# Altium PCB 8 step seq SMT.PcbDoc
Units mm, origin at the board's own origin, x right, y up, seen from the top; angles counter-clockwise.
Board outline 69.8 x 106.5 mm, 2 copper layers (Top Layer, Bottom Layer); 116 components, 86 nets, 323 pads, 0 vias.
Unrouted connection lines stored in the file: 202.
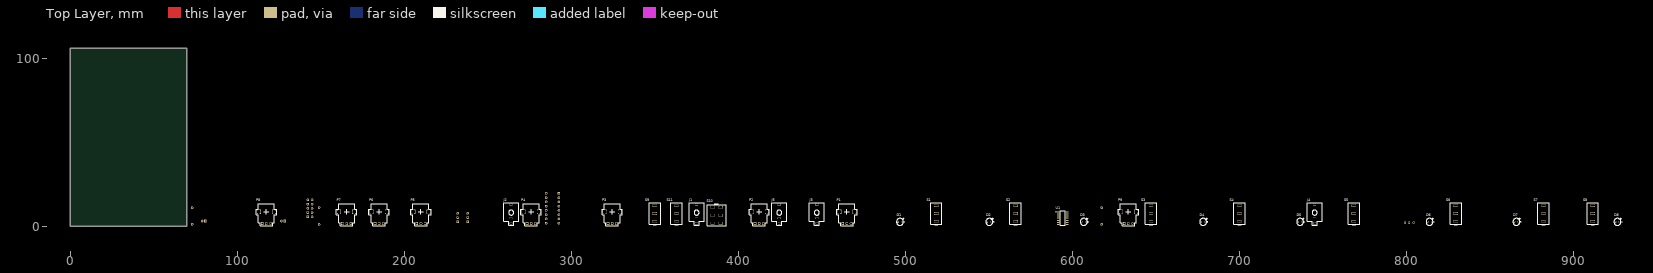
[diagram p0: Top Layer view]
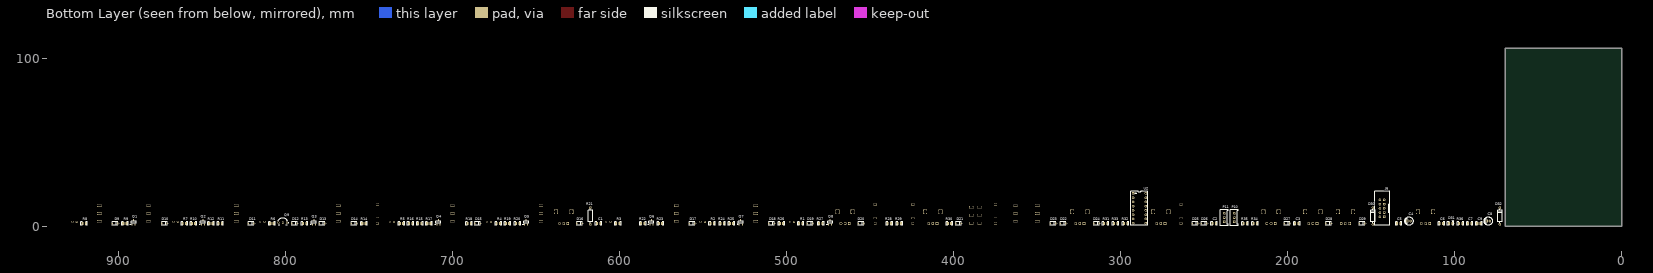
[diagram p1: Bottom Layer view, seen from below]

## Layer stack, top to bottom
Top Solder: solder mask 0.0102, Solder Resist, Dk 3.5
Top Layer: signal copper 0.0356
Dielectric 1: dielectric 0.32, FR-4, Dk 4.8
Bottom Layer: signal copper 0.0356
Bottom Solder: solder mask 0.0102, Solder Resist, Dk 3.5

## Board outline
0,0 0,106.5 69.8,106.5 69.8,0

## Design rules (kind name [scope] priority, off if disabled: settings)
Clearance [All] p1: gap=0.2 ignorepadtopadclearanceinfootprint=FALSE except(0.25: Arc-Hole Track-Hole SMDPad-Hole THPad-Hole Via-Hole Fill-Hole Poly-Hole Region-Hole Text-Hole)
Height [All] p1: minheight=0 maxheight=35 prefheight=12.7
HoleSize [All] p1: absolutevalues=TRUE maxlimit=6.2 minlimit=0 maxpercent=80.000 minpercent=20.000
HoleToHoleClearance [All] p1: gap=0.3 allowstackedmicrovias=TRUE
MinimumSolderMaskSliver [All] p1: minsoldermaskwidth=0.2
PolygonConnect [All] p1: connectstyle=Relief reliefconductorwidth=0.254 reliefentries=4 polygonreliefangle="90 Angle" airgapwidth=0.254
RoutingVias [All] p1: holewidth=0.2 width=0.5 viastyle="Through Hole" minholewidth=0.15 minwidth=0.3 maxholewidth=0.711 maxwidth=1.27
SilkToSilkClearance [All] p1: silktosilkclearance=0.15
SilkToSolderMaskClearance [IsPad] p1: minsilkscreentomaskgap=0.1 clearancetoexposedcopper=TRUE
SolderMaskExpansion [All] p1: expansion=0.05 istentingtop=FALSE
SupplyNets "Schematic Supply Nets_2" [InNet('-12 V')] p1: voltage=0.000
SupplyNets "Schematic Supply Nets_1" [InNet('GND')] p2: voltage=0.000
SupplyNets "Schematic Supply Nets" [InNet('+12 V')] p3: voltage=0.000
Width [All] p1: maxlimit=0.5 minlimit=0.2 preferedwidth=0.254
24 further rules are at their usual default settings.

## Components (designator, comment, footprint, x,y, rotation, side; value= is the part's Value field where it differs from the comment)
C1 "CAP" "Cap SMD 0805" 613.599,1.5 r180 bottom value=1uF
C2 "CAP" "Cap SMD 0805" 245.099,1.5 r180 bottom value=1nF
C3 "CAP" "Cap SMD 0805" 195.6,1.5 r180 bottom value=100nF
C4 "CAP" "Cap electrolytic THT 5mm" 128.5,3 r180 bottom value=47uF
C5 "CAP" "Cap SMD 0805" 134.6,1.5 r180 bottom value=100nF
C6 "CAP" "Cap SMD 0805" 109.1,1.5 r180 bottom value=100nF
C7 "CAP" "Cap SMD 0805" 92.1,1.5 r180 bottom value=100nF
C8 "CAP" "Cap electrolytic THT 5mm" 81,3 r180 bottom value=47uF
C9 "CAP" "Cap SMD 0805" 86.6,1.5 r180 bottom value=100nF
D1 "LED" "LED THT 3 mm raised" 495.499,2.5 r0 top
D2 "LED" "LED THT 3 mm raised" 548.999,2.5 r0 top
D3 "LED" "LED THT 3 mm raised" 605.499,2.5 r0 top
D4 "LED" "LED THT 3 mm raised" 676.999,2.5 r0 top
D5 "LED" "LED THT 3 mm raised" 734.998,2.5 r0 top
D6 "LED" "LED THT 3 mm raised" 812.498,2.5 r0 top
D7 "LED" "LED THT 3 mm raised" 864.498,2.5 r0 top
D8 "LED" "LED THT 3 mm raised" 924.998,2.5 r0 top
D9 "DIODE" SOD-123 903.68,1.5 r180 bottom
D10 "DIODE" SOD-123 874.18,1.5 r180 bottom
D11 "DIODE" SOD-123 822.18,1.5 r180 bottom
D12 "DIODE" SOD-123 796.18,1.5 r180 bottom
D13 "DIODE" SOD-123 779.68,1.5 r180 bottom
D14 "DIODE" SOD-123 760.68,1.5 r180 bottom
D15 "DIODE" SOD-123 686.681,1.5 r180 bottom
D16 "DIODE" SOD-123 625.681,1.5 r180 bottom
D17 "DIODE" SOD-123 558.181,1.5 r180 bottom
D18 "DIODE" SOD-123 510.681,1.5 r180 bottom
D19 "DIODE" SOD-123 487.681,1.5 r180 bottom
D20 "DIODE" SOD-123 457.181,1.5 r180 bottom
D21 "DIODE" SOD-123 398.681,1.5 r180 bottom
D22 "DIODE" SOD-123 336.181,1.5 r180 bottom
D23 "DIODE" SOD-123 342.181,1.5 r180 bottom
D24 "DIODE" SOD-123 316.181,1.5 r180 bottom
D25 "DIODE" SOD-123 257.181,1.5 r180 bottom
D26 "DIODE" SOD-123 251.681,1.5 r180 bottom
D27 "DIODE" SOD-123 202.182,1.5 r180 bottom
D28 "DIODE" SOD-123 177.182,1.5 r180 bottom
D29 "DIODE" SOD-123 157.182,1.5 r180 bottom
D30 "SCHOTTKY" "Diode THT 10 mm" 149,1 r90 bottom
D31 "LED" "LED SMD 0805" 103.512,1.5 r180 bottom
D32 "SCHOTTKY" "Diode THT 10 mm" 73,1 r90 bottom
J1 "JACK Mono" PJ301M 374.999,8 r0 top
J2 "JACK Mono" PJ301M 263.999,8 r0 top
J3 "JACK Mono" PJ301M 446.999,8 r0 top
J4 "JACK Mono" PJ301M 744.998,8 r0 top
J5 "JACK Mono" PJ301M 424.499,8 r0 top
J6 "IDC 10" "IDC 10 PIN" 142.273,5.5 r180 bottom
P1 "Mono Pot" "9 mm PCB Potentiometer" 464.999,8.5 r0 top value=B100k
P2 "Mono Pot" "9 mm PCB Potentiometer" 412.499,8.5 r0 top value=B100k
P3 "Mono Pot" "9 mm PCB Potentiometer" 324.499,8.5 r0 top value=B100k
P4 "Mono Pot" "9 mm PCB Potentiometer" 275.999,8.5 r0 top value=B100k
P5 "Mono Pot" "9 mm PCB Potentiometer" 210,8.5 r0 top value=B100k
P6 "Mono Pot" "9 mm PCB Potentiometer" 185,8.5 r0 top value=B100k
P7 "Mono Pot" "9 mm PCB Potentiometer" 165.5,8.5 r0 top value=B100k
P8 "Mono Pot" "9 mm PCB Potentiometer" 117.5,8.5 r0 top value=B100k
P9 "VR" "9 mm PCB Potentiometer" 633.499,8.5 r0 top value=B250k
P10 "VR" "Multiturn Potentiometer inline" 231.999,2.5 r90 bottom value=5k
P11 "VR" "Multiturn Potentiometer inline" 237.999,2.5 r90 bottom value=2k
Q1 "BC847" SOT-23-3 891.921,1 r180 bottom
Q2 "BC847" SOT-23-3 850.421,1 r180 bottom
Q3 "BC847" SOT-23-3 783.921,1 r180 bottom
Q4 "BC847" SOT-23-3 709.422,1 r180 bottom
Q5 "BC847" SOT-23-3 656.922,1 r180 bottom
Q6 "BC847" SOT-23-3 581.922,1 r180 bottom
Q7 "BC847" SOT-23-3 528.422,1 r180 bottom
Q8 "BC847" SOT-23-3 474.922,1 r180 bottom
Q9 "BC547" "TO-92 wide" 804.215,2 r180 bottom
R1 "RES" "Resistor SMD 0805" 492.599,1.5 r180 bottom value=1k
R2 "RES" "Resistor SMD 0805" 545.599,1.5 r180 bottom value=1k
R3 "RES" "Resistor SMD 0805" 602.099,1.5 r180 bottom value=1k
R4 "RES" "Resistor SMD 0805" 673.599,1.5 r180 bottom value=1k
R5 "RES" "Resistor SMD 0805" 731.598,1.5 r180 bottom value=1k
R6 "RES" "Resistor SMD 0805" 809.098,1.5 r180 bottom value=1k
R7 "RES" "Resistor SMD 0805" 861.598,1.5 r180 bottom value=1k
R8 "RES" "Resistor SMD 0805" 921.598,1.5 r180 bottom value=1k
R9 "RES" "Resistor SMD 0805" 897.098,1.5 r180 bottom value=100k
R10 "RES" "Resistor SMD 0805" 856.098,1.5 r180 bottom value=100k
R11 "RES" "Resistor SMD 0805" 840.098,1.5 r180 bottom value=100k
R12 "RES" "Resistor SMD 0805" 845.598,1.5 r180 bottom value=47k
R13 "RES" "Resistor SMD 0805" 789.598,1.5 r180 bottom value=100k
R14 "RES" "Resistor SMD 0805" 754.098,1.5 r180 bottom value=200r
R15 "RES" "Resistor SMD 0805" 720.599,1.5 r180 bottom value=100k
R16 "RES" "Resistor SMD 0805" 726.098,1.5 r180 bottom value=4k7
R17 "RES" "Resistor SMD 0805" 715.099,1.5 r180 bottom value=100k
R18 "RES" "Resistor SMD 0805" 691.099,1.5 r180 bottom value=100k
R19 "RES" "Resistor SMD 0805" 668.099,1.5 r180 bottom value=100k
R20 "RES" "Resistor SMD 0805" 662.099,1.5 r180 bottom value=100k
R21 "RES" "Resistor THT 10mm" 617.499,1 r90 bottom value=6k8
R22 "RES" "Resistor SMD 0805" 587.099,1.5 r180 bottom value=100k
R23 "RES" "Resistor SMD 0805" 576.599,1.5 r180 bottom value=1k
R24 "RES" "Resistor SMD 0805" 539.599,1.5 r180 bottom value=100k
R25 "RES" "Resistor SMD 0805" 534.099,1.5 r180 bottom value=100k
R26 "RES" "Resistor SMD 0805" 504.099,1.5 r180 bottom value=100k
R27 "RES" "Resistor SMD 0805" 480.599,1.5 r180 bottom value=100k
R28 "RES" "Resistor SMD 0805" 439.599,1.5 r180 bottom value=1k
R29 "RES" "Resistor SMD 0805" 433.599,1.5 r180 bottom value=1k
R30 "RES" "Resistor SMD 0805" 403.599,1.5 r180 bottom value=68k
R31 "RES" "Resistor SMD 0805" 310.099,1.5 r180 bottom value=100k
R32 "RES" "Resistor SMD 0805" 298.099,1.5 r180 bottom value=51k
R33 "RES" "Resistor SMD 0805" 304.099,1.5 r180 bottom value=18k
R34 "RES" "Resistor SMD 0805" 220.6,1.5 r180 bottom value=100k
R35 "RES" "Resistor SMD 0805" 226.599,1.5 r180 bottom value=100k
R36 "RES" "Resistor SMD 0805" 97.6,1.5 r180 bottom value=10k
S1 "SPDT" MTS-102 518.499,7.5 r0 top
S2 "SPDT" MTS-102 565.999,7.5 r0 top
S3 "SPDT" MTS-102 646.999,7.5 r0 top
S4 "SPDT" MTS-102 699.999,7.5 r0 top
S5 "SPDT" MTS-102 768.498,7.5 r0 top
S6 "SPDT" MTS-102 829.498,7.5 r0 top
S7 "SPDT" MTS-102 881.998,7.5 r0 top
S8 "SPDT" MTS-102 911.498,7.5 r0 top
S9 "SPDT" MTS-102 349.999,7.5 r0 top
S10 "DPDT" MTS-202 386.999,6.5 r0 top
S11 "SPDT" MTS-102 362.999,7.5 r0 top
U1 "TL074CDR" SOIC14 591.499,8.5 r0 top
U2 "CD4017BE" "DIP-16 socket" 292.599,19.5 r180 bottom

## Footprints (in the part's own frame and the unit in brackets; to place one, negate y for a bottom-side part, rotate by r counter-clockwise, add the part's x,y. Pads: shape width x height; smd on the part's side, far side on the other; paste and mask are expansions set on the pad)
"9 mm PCB Potentiometer" [mm] "Generic 9 mm shaft potentiometer PCB mount"
  rect 1.6x1.6 hole 1.1: 1(-2.5,-7)
  round 1.6 hole 1.1: 2(0,-7) 3(2.5,-7)
  rect 2.4x2.7 hole 1.8 slot 2.2 at 90 deg: 11(-4.575,0) 11(4.575,0)
  silkscreen extent -6.1,-8.25 6.1,4.85, body extent -5.66,-7.1 5.66,5.5, height 25
"Cap electrolytic THT 5mm" [mil] "THT electrolytic capacitor 5 mm diameter"
  rect 60x60 hole 30: 1(0,0)
  round 60 hole 30: 2(78.74,0)
  silkscreen extent -59,-98 138,98, body extent -59,-98 137,98, height 354
"Cap SMD 0805" [mm] "SMD non polarised 0805 capacitor"
  rect 1.3x1.55 smd: 1(0,0) 2(2.1,0)
  silkscreen extent -0.87,-1 2.98,1, body extent -0.1,-0.72 2.2,0.72, height 0.7
"Diode THT 10 mm" [mil] "THT axial diode 10 mm pitch"
  round 60 hole 35.43: 1(0,0) 2(393.7,0)
  silkscreen extent 41,-51 352,51, body extent -21,-53 411,53, height 107
"DIP-16 socket" [mil] "Socket for DIP-16 ICs"
  rect 60x60 hole 30: 1(0,0)
  round 60 hole 30: 2(0,-100) 3(0,-200) 4(0,-300) 5(0,-400) 6(0,-500) 7(0,-600) 8(0,-700) 9(300,-700) 10(300,-600) 11(300,-500) 12(300,-400) 13(300,-300) 14(300,-200) 15(300,-100) 16(300,0)
  silkscreen extent -51,-751 350,50, body extent -33,-747 333,45, height 294
"IDC 10 PIN" [mil] "10 PIN IDC Connector"
  rect 60x60 hole 30: 1(0,0)
  round 60 hole 30: 2(-100,0) 3(0,100) 4(-100,100) 5(0,200) 6(-100,200) 7(0,300) 8(-100,300) 9(0,400) 10(-100,400)
  silkscreen extent -227,-200 127,600, body extent -223,-204 127,604, height 354
"LED SMD 0805" [mm] "SMD LED diode 0805 package"
  rect 1.3x1.55 smd: 1(0,0) 2(2.1,0)
  silkscreen extent -0.87,-1 3.36,1.8, body extent 0.05,-0.63 2.05,0.63, height 0.8
"LED THT 3 mm raised" [mm] "THT LED diode 3 mm diameter"
  round 1.2 hole 0.762: 1(0,0)
  rect 1x1 hole 0.762: 2(2.54,0)
  silkscreen extent -0.83,-2.1 3.93,2.57, body extent -0.64,-1.92 2.92,1.92, height 10.83
MTS-102 [mm] "SPDT on-on toggle switch"
  rect 2.6x1.524 hole 1 slot 2.2 at 0 deg: 1(0,4.7) 2(0,0) 3(0,-4.7)
  silkscreen extent -3.43,-6.79 3.43,6.35, body extent -5.97,-7 5.97,6.45, height 28.44
MTS-202 [mm] "DPDT on-on toggle switch"
  rect 2.6x1.524 hole 1 slot 2.2 at 0 deg: 1(-2.415,-4.7) 2(-2.415,0) 3(-2.415,4.7) 4(2.415,-4.7) 5(2.415,0) 6(2.415,4.7)
  silkscreen extent -5.71,-6.35 5.72,6.79, body extent -6.25,-6.45 6.25,7, height 28.44
"Multiturn Potentiometer inline" [mil] "PCB mount inline multiturn trimmer pot with parameter label"
  rect 60x60 hole 30: 1(0,0)
  round 60 hole 30: 2(100,0) 3(200,0)
  silkscreen extent -89,-94 289,94, body extent -89,-95 289,95, height 454
PJ301M [mm] "3,5 mm Jack mono PCB Mount"
  rect 1.7x1.1 hole 0.6 slot 1.3 at 0 deg: 1(0,-6.48)
  rect 1.9x1.1 hole 0.6 slot 1.5 at 0 deg: 2(0,-3.38) 3(0,4.92)
  silkscreen extent -4.5,-7.5 4.5,6, body extent -4.5,-6.73 4.5,6, height 14
"Resistor SMD 0805" [mm] "SMD resistor 0805 package"
  rect 1.3x1.55 smd: 1(0,0) 2(2.1,0)
  silkscreen extent -0.87,-1 2.98,1, body extent -0.1,-0.72 2.2,0.72, height 0.7
"Resistor THT 10mm" [mil] "THT axial resistor 10 mm pitch"
  round 60 hole 30: 1(0,0) 2(393.7,0)
  silkscreen extent 41,-51 352,51, body extent -14,-59 407,59, height 122
SOD-123 [mm]
  rect 0.91x1.12 smd: 1(0,0) 2(3.27,0)
  silkscreen extent 0,-1 4.06,1, body extent -0.29,-0.85 3.56,0.85, height 1.35
SOIC14 [mm] "SOIC14 SMD package"
  rect 1.55x0.6 smd: 1(0,0) 2(0,-1.27) 3(0,-2.54) 4(0,-3.81) 5(0,-5.08) 6(0,-6.35) 7(0,-7.62) 8(5.4,-7.62) 9(5.4,-6.35) 10(5.4,-5.08) 11(5.4,-3.81) 12(5.4,-2.54) 13(5.4,-1.27) 14(5.4,0)
  silkscreen extent -1.5,-8.17 4.3,0.55, body extent -0.4,-8.19 5.8,0.57, height 1.75
SOT-23-3 [mm] "SOT-23 SMD package 3 pin"
  rect 0.6x1.1 smd: 1(0,0) 2(1.9,0) 3(0.95,2.6)
  silkscreen extent -1,-0.1 2.45,1.8, body extent -0.55,0 2.45,2.6, height 1.1
"TO-92 wide" [mil] "TO-92 THT package wide legs"
  oval 39.37x60 hole 30: 1(0,0) 2(100,0) 3(200,0)
  silkscreen extent -3,-59 242,122, body extent -9,-61 209,104, height 323

## Part data
C1 C2 C3 C5 C6 C7 C9: library part "Capacitor SMD 0805", "SMD Capacitor Non-Polarised 0805 Package", Package Type=SMD
C4 C8: library part "Capacitor Electr THT 5mm", "THT Electrolytic Capacitor 5 mm Diameter", Package Type=THT
D1 D2 D3 D4 D5 D6 D7 D8: library part "LED THT 3mm", "THT LED Diode 3 mm Diameter", Color=RED, Package Type=THT, Type=LED
D9 D10 D11 D12 D13 D14 D15 D16 D17 D18 D19 D20 D21 D22 D23 D24 D25 D26 D27 D28 D29: library part 1N4148W, "1N4148W SMD Diode SOD123 Package", Package Type=SMD, Model=1N4148W, Type=Diode
D30 D32: library part "Schottky Diode THT", "Generic THT Axial Schottky Diode 10 mm Pitch", Package Type=THT, Model=1N5819, Type=Schottky
D31: library part "LED SMD", "SMD LED Diode 0805 Package", Color=GREEN, Package Type=SMD, Type=LED
J1 J2 J3 J4 J5: library part PJ301M, "PJ301M Eurorack 3,5 mm Patch Socket PCB Mount", Package Type=THT
  J1: Label="CLK in"
  J2: Label="RESET in"
  J3: Label="CLK out"
  J4: Label="GATE out"
  J5: Label="CV out"
J6: library part "IDC 10 pin", "10 Pin IDC Connector"
P1 P2 P3 P4 P5 P6 P7 P8: library part "Potentiometer 9 mm", "PCB Mount 9mm Mono Potentiometer THT", Package Type=THT, Type=Potentiometer
  P1: Parameter="STEP 1"
  P2: Parameter="STEP 2"
  P3: Parameter="STEP 3"
  P4: Parameter="STEP 4"
  P5: Parameter="STEP 5"
  P6: Parameter="STEP 6"
  P7: Parameter="STEP 7"
  P8: Parameter="STEP 8"
P9: library part "VR B 9 mm", "PCB Mount 9mm Mono Potentiometer THT as Variable Resistor Clockwise Decrease", Package Type=THT, Parameter=RATE, Type=Potentiometer
P10 P11: library part "VR A Multiturn THT", "PCB Mount Multiturn Trimmer Potentiometer Top Adjustable as Variable Resistor Clockwise Increase", Package Type=THT, Type=Potentiometer
Q1 Q2 Q3 Q4 Q5 Q6 Q7 Q8: "BC847 NPN Transistor SMD SOT-23-3 Package", Package=SOT-23-3, Package Type=SMD, Type="NPN Transistor"
Q9: "BC547 NPN Transistor THT TO-92 Package", Package=TO-92, Package Type=THT, Type="NPN Transistor"
R1 R2 R3 R4 R5 R6 R7 R8 R9 R10 R11 R12 R13 R14 R15 R16 R17 R18 R19 R20 R22 R23 R24 R25 R26 R27 R28 R29 R30 R31 R32 R33 R34 R35 R36: library part "Resistor SMD 0805", "SMD Resistor 0805 package", Package Type=SMD
R21: library part "Resistor THT", "THT Axial Resistor 10mm Pitch", Package Type=THT
S1 S2 S3 S4 S5 S6 S7 S8 S9 S11: library part MTS-102, "Single Pole Double Throw on-on Switch", Package Type=THT, Type=Switch
  S1: Signals="GATE 1"
  S2: Signals="GATE 2"
  S3: Signals="GATE 3"
  S4: Signals="GATE 4"
  S5: Signals="GATE 5"
  S6: Signals="GATE 6"
  S7: Signals="GATE 7"
  S8: Signals="GATE 8"
  S9: Signals=ODD/EVEN
  S11: Signals="OUT RANGE"
S10: library part MTS-202, "Dual Pole Dual Throw on-on Switch", Package Type=THT, Signals="STEP COUNT", Type=Switch
U1: library part "TL074CDR SOIC14", "TL074CDR Quad Op-Amp SOIC14 Package", Package=SOIC14, Package Type=SMD, Type="Op Amp"
U2: library part "CD4017BE DIP-16", "CD4017BE CMOS Decade Counter DIP-16 Package", Package=DIP-16, Package Type=THT, Type=Counter

## Nets (pads, with @x,y where several pads share a name; then routed paths per layer and width w, separated by ;. In a path a pad name is that pad's centre, name@x,y a point inside that pad or via, vN(x,y) a via of type N, cw(c..) or ccw(c..) an arc to the next point about the centre after c; other vN are vias at no path point)
2,5V: R33.1 S11.3
"3 st": P4.3 R20.2 S4.1 S10.4 U2.7
"4 st": P5.3 R17.2 S5.1 S10.1 U2.10
"5 st": P6.3 R13.2 S6.1 S10.6 U2.1
5V: R32.1 S11.1
"8 st": S10.3 U2.9
"+12 V": C3.2 C4.2 C5.2 C6.2 D30.2 D31.1 Q9.1 R1.2 R2.2 R3.2 R4.2 R5.2 R6.2 R7.2 R8.2 R11.1 U1.4 U2.16
"-12 V": C7.1 C8.1 C9.1 D32.1 U1.11
"CLK buf": D13.2 R28.2 U1.6 U1.7 U2.14
"CV out": J5.3 R29.1
EVEN: S9.1 S10.2
"G1 on": P1.3 R27.2 S1.1 U2.3
"G2 on": P2.3 R25.2 S2.1 U2.2
"G3 on": P3.3 R22.2 S3.1 U2.4
"G7 on": P7.3 R10.2 S7.1 U2.5
"G8 on": P8.3 R9.2 S8.1 U2.6
"GATE out": J4.3 R14.1
GND: C1.1 C3.1 C4.1 C5.1 C6.1 C7.2 C8.2 C9.2 J1.1 J2.1 J2.2 J3.1 J4.1 J5.1 J6.3 J6.4 J6.5 J6.6 J6.7 J6.8 P10.1 P11.1 Q1.2 Q2.2 Q3.2 Q4.2 Q5.2 Q6.2 Q7.2 Q8.2 R12.2 R15.2 R16.2 R19.1 R26.1 R31.1 R34.1 R35.1 R36.2 U2.8 U2.13
NetC1_2: C1.2 R21.1 U1.2
NetC2_1: C2.1 J2.3
NetC2_2: C2.2 D26.1 R34.2
NetD1_1: D1.1 R1.1
NetD1_2: D1.2 Q8.3
NetD2_1: D2.1 R2.1
NetD2_2: D2.2 Q7.3
NetD3_1: D3.1 R3.1
NetD3_2: D3.2 Q6.3
NetD4_1: D4.1 R4.1
NetD4_2: D4.2 Q5.3
NetD5_1: D5.1 R5.1
NetD5_2: D5.2 Q4.3
NetD6_1: D6.1 R6.1
NetD6_2: D6.2 Q3.3
NetD7_1: D7.1 R7.1
NetD7_2: D7.2 Q2.3
NetD8_1: D8.1 R8.1
NetD8_2: D8.2 Q1.3
NetD9_1: D9.1 S8.2
NetD9_2: D9.2 D10.2 D11.2 D14.2 D15.2 D16.2 D17.2 D18.2 R18.1
NetD10_1: D10.1 S7.2
NetD11_1: D11.1 S6.2
NetD12_1: D12.1 U1.14
NetD12_2: D12.2 Q9.2 R15.1
NetD13_1: D13.1 R18.2 R19.2 U1.12
NetD14_1: D14.1 S5.2
NetD15_1: D15.1 S4.2
NetD16_1: D16.1 S3.2
NetD17_1: D17.1 S2.2
NetD18_1: D18.1 S1.2
NetD19_1: D19.1 P1.2
NetD19_2: D19.2 D20.2 D21.2 D24.2 D25.2 D27.2 D28.2 D29.2 R30.2
NetD20_1: D20.1 P2.2
NetD21_1: D21.1 P3.2
NetD22_1: D22.1 J1.3
NetD22_2: D22.2 R31.2 U1.5
NetD23_1: D23.1 S9.2
NetD23_2: D23.2 D26.2 R35.2 U2.15
NetD24_1: D24.1 P4.2
NetD25_1: D25.1 P5.2
NetD27_1: D27.1 P6.2
NetD28_1: D28.1 P7.2
NetD29_1: D29.1 P8.2
NetD30_1: D30.1 J6.9 J6.10
NetD31_2: D31.2 R36.1
NetD32_2: D32.2 J6.1 J6.2
NetJ1_2: J1.2 R23.2
NetJ3_3: J3.3 R28.1
NetP1_1: P1.1 P2.1 P3.1 P4.1 P5.1 P6.1 P7.1 P8.1
NetP9_2: P9.2 R21.2
NetP9_3: P9.3 R23.1 R24.2 U1.1
NetP10_2: P10.2 R32.2
NetP11_2: P11.2 R33.2
NetQ1_1: Q1.1 R9.1
NetQ2_1: Q2.1 R10.1
NetQ3_1: Q3.1 R13.1
NetQ4_1: Q4.1 R17.1
NetQ5_1: Q5.1 R20.1
NetQ6_1: Q6.1 R22.1
NetQ7_1: Q7.1 R25.1
NetQ8_1: Q8.1 R27.1
NetQ9_3: Q9.3 R14.2 R16.1
NetR11_2: R11.2 R12.1 U1.13
NetR24_1: R24.1 R26.2 U1.3
NetR29_2: R29.2 U1.8 U1.9
NetR30_1: R30.1 S11.2 U1.10
ODD: S9.3 S10.5
pads on no net: J3.2 J4.2 J5.2 P1.11 P2.11 P3.11 P4.11 P5.11 P6.11 P7.11 P8.11 P9.1 P9.11 P10.3 P11.3 S1.3 S2.3 S3.3 S4.3 S5.3 S6.3 S7.3 S8.3 U2.11 U2.12